# Altium PCB PCB1.PcbDoc
Units mil, origin at the board's own origin, x right, y up, seen from the top; angles counter-clockwise.
Board outline 6195 x 3955 mil, 2 copper layers (Top Layer, Bottom Layer); 31 components, 47 nets, 182 pads, 4 vias.
Unrouted connection lines stored in the file: 2.
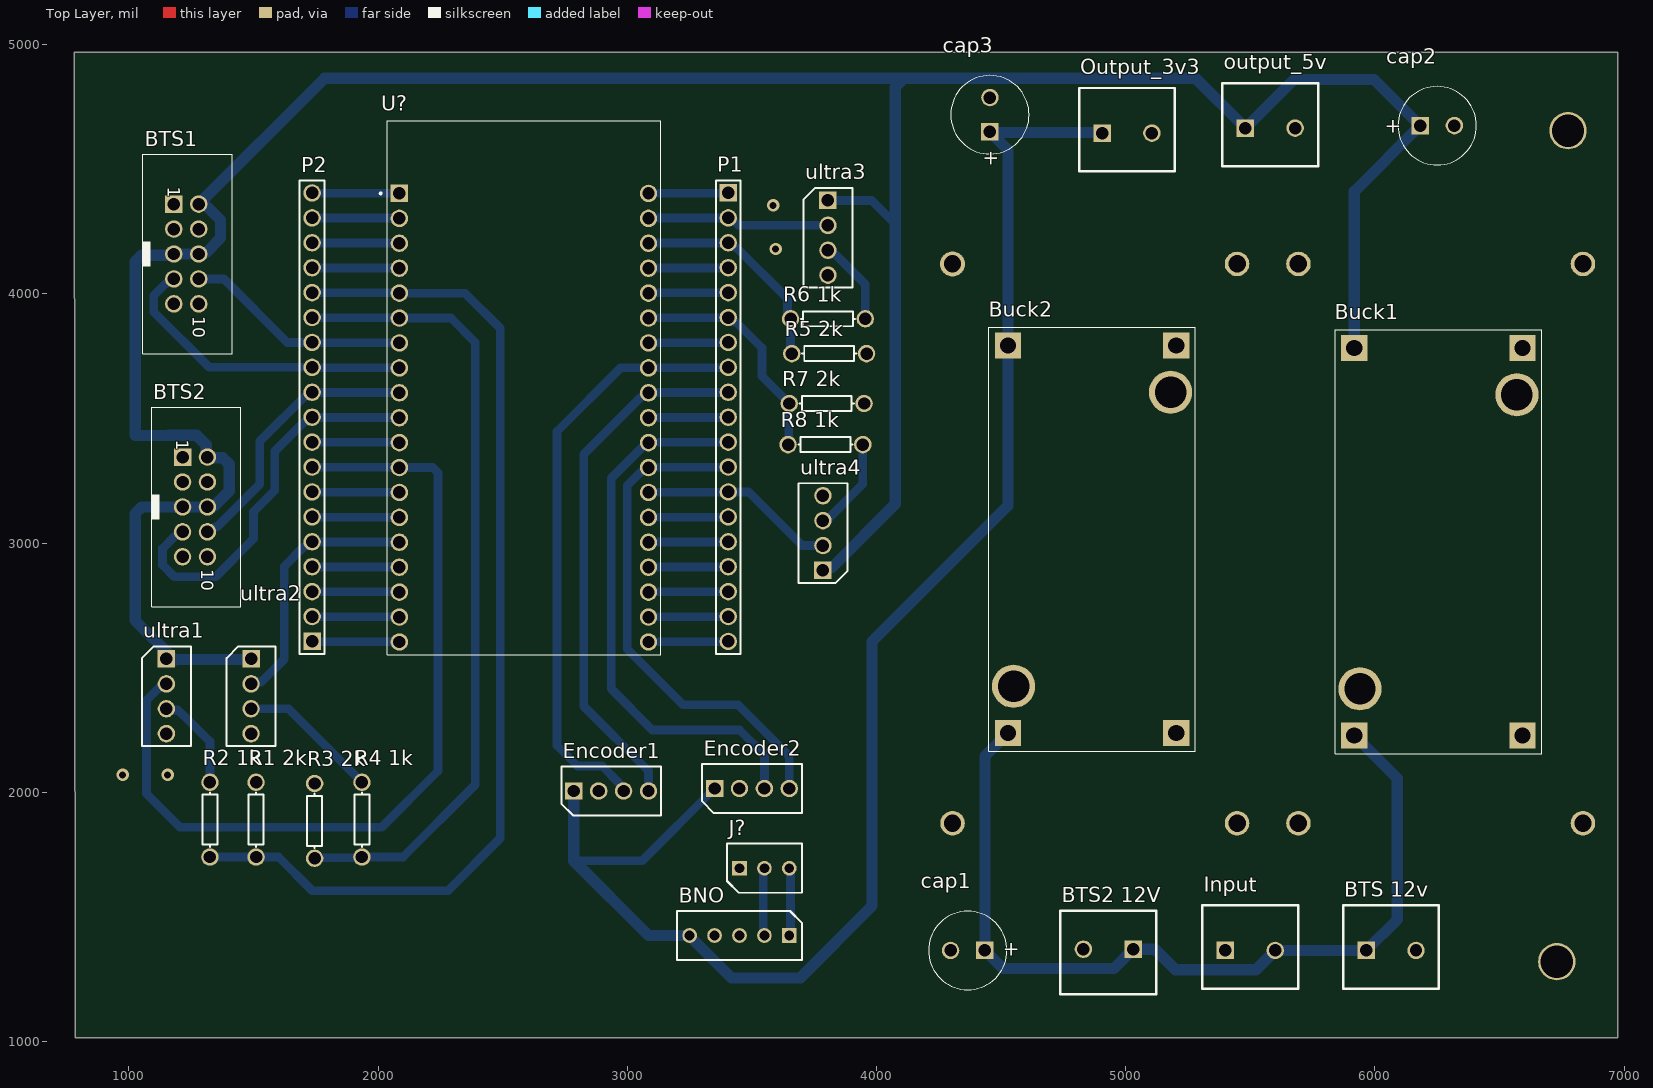
[diagram p0: Top Layer view]
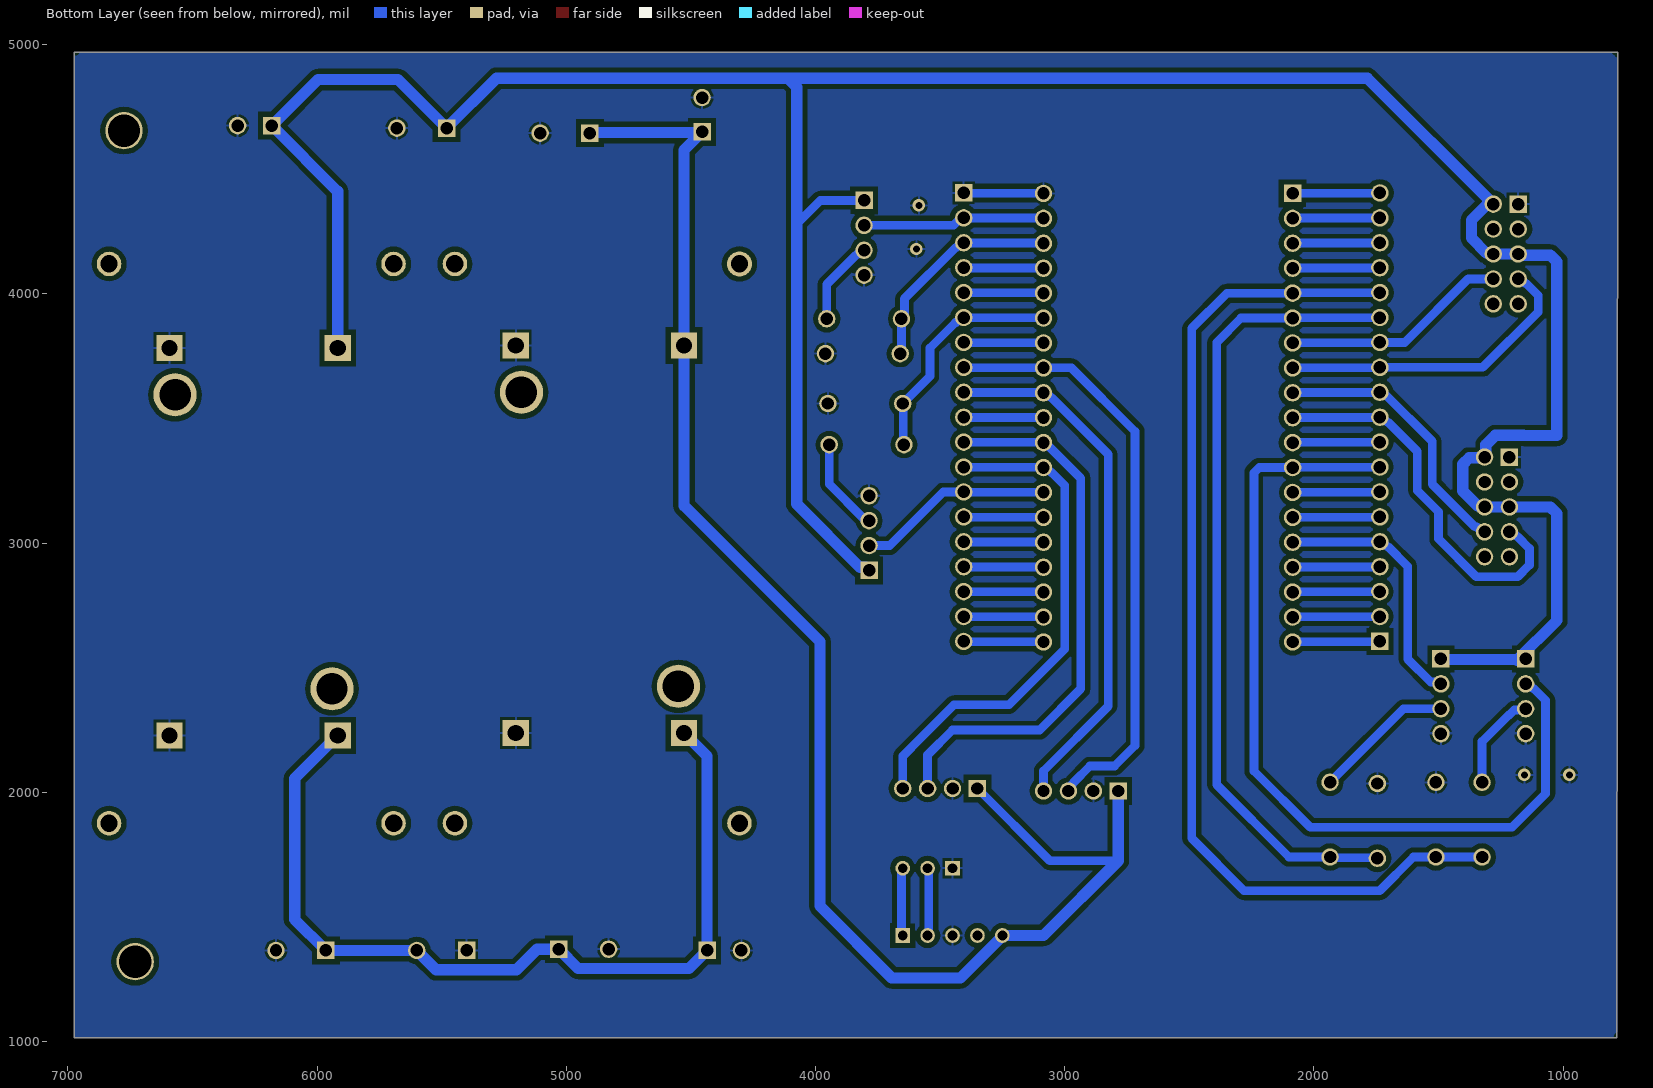
[diagram p1: Bottom Layer view, seen from below]
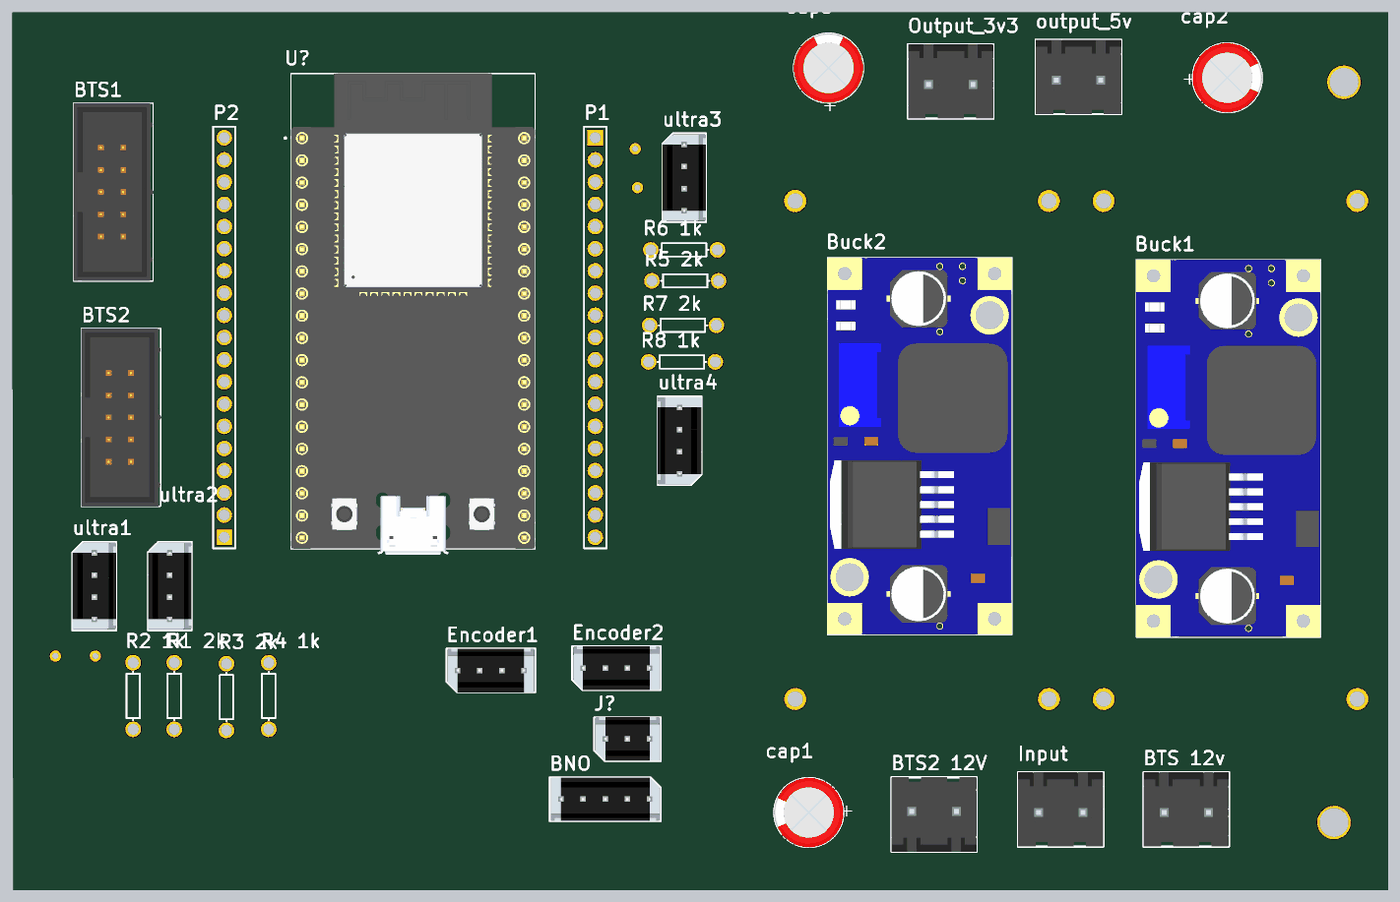
[diagram p2: 3D render of the assembled board from above, using the file's embedded part models]

## Layer stack, top to bottom
Top Solder: solder mask 0.4, Solder Resist, Dk 3.5
Top Layer: signal copper 1.4
Dielectric 1: dielectric 12.6, FR-4, Dk 4.8
Bottom Layer: signal copper 1.4
Bottom Solder: solder mask 0.4, Solder Resist, Dk 3.5

## Board outline
780,4970 6975,4970 6975,1015 785,1015

## Design rules (kind name [scope] priority, off if disabled: settings)
Clearance [All] p1: gap=20 ignorepadtopadclearanceinfootprint=FALSE except(10: SMDPad-SMDPad SMDPad-THPad THPad-THPad)
PolygonConnect [All] p1: connectstyle=Relief reliefconductorwidth=10 reliefentries=4 polygonreliefangle="90 Angle" airgapwidth=10
RoutingVias [All] p1: holewidth=28 width=50 viastyle="Through Hole" minholewidth=28 minwidth=50 maxholewidth=28 maxwidth=50
SolderMaskExpansion [All] p1: expansion=4 istentingtop=FALSE
Width [All] p1: maxlimit=45 minlimit=15 preferedwidth=30 minimp=50.000000 maximp=50.000000 favimp=50.000000
30 further rules are at their usual default settings.

## Components (designator, comment, footprint, x,y, rotation, side; value= is the part's Value field where it differs from the comment)
BNO "66100511622" 66100511622 3450,1425 r0 top
BTS1 "61201021621" 61201021621 1230,4160 r270 top
BTS2 "61201021621" 61201021621 1265,3145 r270 top
"BTS2 12V" "691701500002B" 691701500002B 4930,1370 r180 top
"BTS 12v" "691701500002B" 691701500002B 6065,1365 r0 top
Buck1 "MC00100" CONV_MC00100 6255,3005 r90 top
Buck2 "MC00100" CONV_MC00100 4865,3015 r90 top
cap1 "330 μF" "WCAP-AT1H 8x11.5x3.5x0.5" 4366.1,1365 r180 top
cap2 "330 μF" "WCAP-AT1H 8x11.5x3.5x0.5" 6250,4675 r0 top
cap3 "330 μF" "WCAP-AT1H 8x11.5x3.5x0.5" 4455,4718.9 r90 top
Encoder1 "66100411622" 66100411622 2935,2005 r180 top (schematic designator encoder1)
Encoder2 "66100411622" 66100411622 3500,2015 r180 top (schematic designator encoder2)
Input "691701500002B" 691701500002B 5500,1365 r0 top
J? "66100311622" 66100311622 3550,1695 r180 top
Output_3v3 "691701500002B" 691701500002B 5005,4645 r0 top
output_5v "691701500002B" 691701500002B 5580,4665 r0 top
P1 "Header 19" HDR1X19 3405,4405 r270 top
P2 "Header 19" HDR1X19 1735,2605 r90 top
"R1 2k" "Res1" AXIAL-0.3 1510,1890 r270 top value=1K
"R2 1k" "Res1" AXIAL-0.3 1325,1890 r90 top value=1K
"R3 2k" "Res1" AXIAL-0.3 1745,1885 r270 top value=1K
"R4 1k" "Res1" AXIAL-0.3 1935,1890 r90 top value=1K
"R5 2k" "Res1" AXIAL-0.3 3810,3760 r180 top value=1K
"R6 1k" "Res1" AXIAL-0.3 3805,3900 r0 top value=1K
"R7 2k" "Res1" AXIAL-0.3 3800,3560 r180 top value=1K
"R8 1k" "Res1" AXIAL-0.3 3795,3395 r0 top value=1K
U? "ESP32-DEVKITC-32D" MODULE_ESP32-DEVKITC-32D 2585,3625 r0 top
ultra1 "66100411622" 66100411622 1150,2385 r90 top
ultra2 "66100411622" 66100411622 1490,2385 r90 top
ultra3 "66100411622" 66100411622 3805,4225 r90 top
ultra4 "66100411622" 66100411622 3785,3040 r270 top

## Footprints (in the part's own frame and the unit in brackets; to place one, negate y for a bottom-side part, rotate by r counter-clockwise, add the part's x,y. Pads: shape width x height; smd on the part's side, far side on the other; paste and mask are expansions set on the pad)
61201021621 [mil] "10 pins, straight, gold plating"
  rect 70x70 hole 50: 1(-200,-50)
  round 70 hole 50: 2(-200,50) 3(-100,-50) 4(-100,50) 5(0,-50) 6(0,50) 7(100,-50) 8(100,50) 9(200,-50) 10(200,50)
  silkscreen extent -401,-174 401,184, body extent -401,-174 401,187, height 359
66100311622 [mm] "2.54 mm Intercom Male Horizontal Shrouded Header, 3p"
  rect 1.5x1.5 hole 1: 1(2.54,0)
  round 1.5 hole 1: 2(0,0) 3(-2.54,0)
  silkscreen extent -3.81,-2.5 3.81,2.5, body extent -3.66,-2.54 3.66,2.46, height 11.25
66100411622 [mil] "2.54 mm Intercom Male Horizontal Shrouded Header, 4p"
  rect 70x70 hole 50: 1(150,0)
  round 70 hole 50: 2(50,0) 3(-50,0) 4(-150,0)
  silkscreen extent -200,-98 200,98, body extent -194,-98 194,98, height 443
66100511622 [mm] "2.54 mm Intercom Male Horizontal Shrouded Header, 5p"
  rect 1.5x1.5 hole 1: 1(5.08,0)
  round 1.5 hole 1: 2(2.54,0) 3(0,0) 4(-2.54,0) 5(-5.08,0)
  silkscreen extent -6.35,-2.5 6.35,2.5, body extent -6.2,-2.5 6.2,2.5, height 11.25
691701500002B [mil] "THR - 5,08mm - PCB Vertical Open - 02p"
  rect 70x70 hole 50: 1(-100,0)
  round 70 hole 50: 2(100,0)
  silkscreen extent -192,-154 192,181, body extent -192,-154 192,181, height 474
AXIAL-0.3 [mil] "Axial Device, Thru-Hole; 2 Leads; 0.3 in Pin Spacing"
  round 70 hole 50: 1(-150,0) 2(150,0)
  silkscreen extent -109,-30 109,30
CONV_MC00100 [mil]
  rect 105.63x105.63 hole 65 mask+4.02: IN+(-777.5,337.5) IN-(-777.5,-337.5) OUT+(777.5,337.5) OUT-(777.5,-337.5)
  round 173.23 hole 125.98 mask+4.02: MH1(-590,315) MH2(590,-315)
  silkscreen extent -850,-415 850,415, body extent -850,-415 850,415, height 551
HDR1X19 [mil] "Connector; Header; 19 Position"
  rect 70x70 hole 50: 1(0,0)
  round 70 hole 50: 2(100,0) 3(200,0) 4(300,0) 5(400,0) 6(500,0) 7(600,0) 8(700,0) 9(800,0) 10(900,0) 11(1000,0) 12(1100,0) 13(1200,0) 14(1300,0) 15(1400,0) 16(1500,0) 17(1600,0) 18(1700,0) 19(1800,0)
  silkscreen extent -50,-50 1850,50
MODULE_ESP32-DEVKITC-32D [mil]
  rect 70x70 hole 50: J2-1(-500,777.95)
  round 70 hole 50: J2-2(-500,677.95) J2-3(-500,577.95) J2-4(-500,477.95) J2-5(-500,377.95) J2-6(-500,277.95) J2-7(-500,177.95) J2-8(-500,77.95) J2-9(-500,-22.05) J2-10(-500,-122.05) J2-11(-500,-222.05) J2-12(-500,-322.05) J2-13(-500,-422.05) J2-14(-500,-522.05) J2-15(-500,-622.05) J2-16(-500,-722.05) J2-17(-500,-822.05) J2-18(-500,-922.05) J2-19(-500,-1022.05) J3-1(500,777.95) J3-2(500,677.95) J3-3(500,577.95) J3-4(500,477.95) J3-5(500,377.95) J3-6(500,277.95) J3-7(500,177.95) J3-8(500,77.95) J3-9(500,-22.05) J3-10(500,-122.05) J3-11(500,-222.05) J3-12(500,-322.05) J3-13(500,-422.05) J3-14(500,-522.05) J3-15(500,-622.05) J3-16(500,-722.05) J3-17(500,-822.05) J3-18(500,-922.05) J3-19(500,-1022.05)
  silkscreen extent -579,-1073 549,1069, body extent -550,-1098 550,1071, height 263
"WCAP-AT1H 8x11.5x3.5x0.5" [mil] "Polarized capacitors, Aluminum Electrolytic Capacitors, 2-Leads, Body 8x11.5x3.5x0.5"
  rect 70x70 hole 50: 1(-68.9,0)
  round 70 hole 50: 2(68.9,0)
  silkscreen extent -157,-157 157,157, body extent -156,-157 157,157, height 768

## Part data
BNO: "WR-WTB 2.54 mm Intercom Male Horizontal Shrouded Header, 5p", ComponentLink1Description=Manufacturer, ComponentLink1URL=http://www.we-online.de, ComponentLink2Description=Datasheet, ComponentLink2URL=http://katalog.we-online.de/em/datasheet/6610XX11622.pdf, Part Number=66100511622, Pin Number=5, Pitch="2.54 mm", Published Date="June 2017", Publisher="Wurth Elektronik"
BTS1 BTS2: "WR-BHD 2.54mm Male Box Header", Manufacturer="Wurth Elektronik", ComponentLink1 Description=Manufacturer, ComponentLink1URL=http://www.we-online.com, ComponentLink2 Description=Datasheet, ComponentLink2URL=http://katalog.we-online.de/em/datasheet/6120xx21621.pdf, Created by="Baojun Chen", Created Date="March 2016", NoPins=10, partNo=61201021621
"BTS2 12V" "BTS 12v" Input Output_3v3 output_5v: "WR-TBL Serie 7015 B - 5.08 mm Open Vertical PCB Header THR Type, 02p", ComponentLink1Description=Manufacturer, ComponentLink1URL=http://www.we-online.de, ComponentLink2Description=Datasheet, ComponentLink2URL=http://katalog.we-online.de/em/datasheet/6917015000xxB.pdf, Part Number=691701500002B, Pin Number=02p, Pitch="5.08 mm", Published Date="Feb. 2017", Publisher="Wurth Elektronik"
Buck1 Buck2: "DC-DC LM2596 Step Down Adjustable Converter Power Supply Module 1.3V-35V", Package=None, Check_prices=https://www.snapeda.com/parts/MC00100/YKS/view-part/?ref=eda, MF=YKS, MP=MC00100, SnapEDA_Link=https://www.snapeda.com/parts/MC00100/YKS/view-part/?ref=snap
cap1 cap2 cap3: library part "WCAP-AT1H 8x11.5x3.5x0.5 860240274006", "WCAP-AT1H Aluminum Electrolytic Capacitors , 330 μF; + / - 20%; 10 V , 8 x 11,5", Manufacturer="Wurth Elektronik", partNo=860240274006, Application="Medium and high voltage type range from 160V-450V used as primary side input filter in power supply; Low voltage type used as energy storage or low frequency filtering in circuit, applied to general switching power supply, AC-DC converter, adapter, charger, TV, VCR, DC motor circuit filter, digital audio, digital cameras, digital video cameras, satellite receiver etc.", Capacitance="330 μF", Characteristics="Aluminum Electrolytic Capacitor; Recommended soldering: Wave; Operating temperature:–40 °C to +105 °C for UR < 400 V; –25 °C to +105 °C for UR ≥ 400 V; Long life product series; Higher permissible ripple current; Load life: 5000–10000 h @ +105 °C", ComponentLink1Description=Manufacturer, ComponentLink1URL=http://www.we-online.com, ComponentLink2Description=Datasheet, ComponentLink2URL=http://katalog.we-online.de/pbs/datasheet/860240274006.pdf, Created by="Karrer Zheng", Created Date=6/8/2015, E-mail=libraries@we-online.com
Encoder1 Encoder2 ultra1 ultra2 ultra3 ultra4: "WR-WTB 2.54 mm Intercom Male Horizontal Shrouded Header, 4p", ComponentLink1Description=Manufacturer, ComponentLink1URL=http://www.we-online.de, ComponentLink2Description=Datasheet, ComponentLink2URL=http://katalog.we-online.de/em/datasheet/6610XX11622.pdf, Part Number=66100411622, Pin Number=4, Pitch="2.54 mm", Published Date="June 2017", Publisher="Wurth Elektronik"
J?: "WR-WTB 2.54 mm Intercom Male Horizontal Shrouded Header, 3p", ComponentLink1Description=Manufacturer, ComponentLink1URL=http://www.we-online.de, ComponentLink2Description=Datasheet, ComponentLink2URL=http://katalog.we-online.de/em/datasheet/6610XX11622.pdf, Part Number=66100311622, Pin Number=3, Pitch="2.54 mm", Published Date="June 2017", Publisher="Wurth Elektronik"
P1 P2: "Header, 19-Pin", LatestRevisionDate=17-Jul-2002, LatestRevisionNote="Re-released for DXP Platform.", Publisher="Altium Limited"
"R1 2k" "R2 1k" "R3 2k" "R4 1k" "R5 2k" "R6 1k" "R7 2k" "R8 1k": "Resistor", LatestRevisionDate=17-Jul-2002, LatestRevisionNote="Re-released for DXP Platform.", PackageDescription="Axial Device, Thru-Hole; 2 Leads; 0.3 in Pin Spacing", PackageReference=AXIAL-0.3, Published=8-Jun-2000, Publisher="Altium Limited"
U?: "WiFi Development Tools (802.11) ESP32 General Development Kit, ESP32-WROOM-32D on the board", Package=None, Check_prices=https://www.snapeda.com/parts/ESP32-DEVKITC-32D/Espressif+Systems/view-part/?ref=eda, MF="Espressif Systems", MP=ESP32-DEVKITC-32D, SnapEDA_Link=https://www.snapeda.com/parts/ESP32-DEVKITC-32D/Espressif+Systems/view-part/?ref=snap

## Free pads (board coordinates)
  round 100 hole 70: 8(4305,4120)
  round 98.43 hole 70: 9(5446.73,4120) 10(4305,1875.91) 11(5446.73,1875.91) 12(5693.27,1875.91) 13(6835,1875.91) 14(6835,4120) 15(5693.27,4120)
  round 150 hole 130 unplated: 18(6775,4655) 19(6730,1320)

## Via types
v1: diameter 50, hole 28, Top Layer to Bottom Layer, 4 vias

## Nets (pads, with @x,y where several pads share a name; then routed paths per layer and width w, separated by ;. In a path a pad name is that pad's centre, name@x,y a point inside that pad or via, vN(x,y) a via of type N, cw(c..) or ccw(c..) an arc to the next point about the centre after c; other vN are vias at no path point)
3v3: BNO.5 Buck2.OUT+ cap3.1 Encoder1.1 Encoder2.1 Output_3v3.1 | length 6288.6
  Bottom Layer w35: 2785,1725 3060,1725 Encoder2.1
  Bottom Layer w45: Encoder1.1 2785,1725 3085,1425 BNO.5 3250,1423.14 3418.14,1255 3693.82,1255 3981.91,1543.09 3981.91,2604.25 4527.5,3149.84 Buck2.OUT+ 4527.5,4577.5 cap3.1@4457.5,4647.5 ; cap3.1 cap3.1@4457.5,4647.5 ; Output_3v3.1 4902.5,4647.5 cap3.1@4457.5,4647.5
+5: BTS1.2 BTS1.5 BTS1.6 BTS2.2 BTS2.5 BTS2.6 Buck1.OUT+ cap2.1 output_5v.1 ultra1.1 ultra2.1 ultra3.1 ultra4.1 | length 11956.8
  Bottom Layer w35: ultra3.1 3980,4375 4075,4280
  Bottom Layer w45: BTS1.6 BTS1.5 1175.22,4155.22 1051.36,4155.22 1025,4128.86 1025,3431.36 1157.11,3431.36 1158.25,3432.5 1271.75,3432.5 1310.22,3394.03 1310.22,3349.78 1317.5,3342.5 1376.14,3342.5 1402.5,3316.14 1402.5,3208.76 1343.53,3149.78 1319.78,3149.78 BTS2.6 BTS2.5 1051.36,3145 1025,3118.64 1025,2690 1185,2530 1187.5,2532.5 1487.5,2532.5 ultra2.1 ; BTS1.6@1308.53,4164.78 1367.5,4223.76 1367.5,4296.24 1308.53,4355.22 1284.78,4355.22 BTS1.2 1785,4865 4110,4865 ; ultra4.1 3797.5,2902.5 3821.24,2902.5 4075,3156.26 4075,4280 4075,4830 4110.3,4865.3 5279.7,4865.3 output_5v.1 5675,4860 5996.1,4860 cap2.1 5917.5,4411.4 Buck1.OUT+
+12: "BTS2 12V.1" "BTS 12v.1" Buck1.IN+ Buck2.IN+ cap1.1 Input.2 | length 3554.9
  Bottom Layer w45: Buck2.IN+ 4435,2145 cap1.1 4507.5,1292.5 4952.5,1292.5 5030,1370 5117.53,1370 5200.03,1287.5 5522.5,1287.5 Input.2 5965,1365 6090,1490 6090,2055 Buck1.IN+
\: "R1 2k.2" "R2 1k.1" P2.15 U?.J2-5 | length 4168.9
  Bottom Layer w35: 1325,1740 1510,1740 1600,1740 1735,1605 2280,1605 2490,1815 2490,3861.59 2348.64,4002.95 U?.J2-5 2083.98,4003.98 1736.02,4003.98 P2.15
echo2: "R3 2k.2" "R4 1k.1" P2.14 U?.J2-6 | length 3238.6
  Bottom Layer w35: P2.14 1736.02,3903.98 2083.98,3903.98 U?.J2-6 2292.05,3902.95 2390,3805 2390,2030 2100,1740 1935,1740 1932.5,1737.5 1747.5,1737.5 1745,1735
echo3: "R5 2k.2" "R6 1k.1" P1.3 U?.J3-3 | length 879.2
  Bottom Layer w35: U?.J3-3 3086.02,4203.98 3403.98,4203.98 P1.3 3415.82,4205 3435.82,4185 3438.14,4185 3643.14,3980 3643.14,3906.86 3655,3895 3655,3765 3660,3760
echo4: "R7 2k.2" "R8 1k.1" P1.6 U?.J3-6 | length 942.1
  Bottom Layer w35: U?.J3-6 3086.02,3903.98 3403.98,3903.98 P1.6 3415.82,3905 3435.82,3885 3438.14,3885 3540.24,3782.9 3540.24,3669.76 3650,3560 3647.5,3557.5 3647.5,3397.5 3645,3395
GND: "BTS2 12V.2" "BTS 12v.2" "R1 2k.1" "R3 2k.1" "R5 2k.1" "R7 2k.1" BNO.3 BTS1.1 BTS2.1 Buck1.IN- Buck1.OUT- Buck2.IN- Buck2.OUT- cap1.2 cap2.2 cap3.2 Encoder1.2 Encoder2.2 Input.1 J?.1 Output_3v3.2 output_5v.2 P1.1 U?.J3-1 ultra1.4 ultra2.4 ultra3.4 ultra4.4 | length 320.8
  Bottom Layer w35: U?.J3-1 3086.02,4403.98 3403.98,4403.98 P1.1
  other v1: 975,2070 1155,2070 3595,4180 3585,4355
M1A: Encoder1.3 P1.8 U?.J3-8 | length 2404.9
  Bottom Layer w35: Encoder1.3 2985,2015.82 2965,2035.82 2965,2038.14 2898.14,2105 2800,2105 2717.57,2187.43 2717.57,3447.57 2972.95,3702.95 U?.J3-8 3086.02,3703.98 3403.98,3703.98 P1.8
M1B: Encoder1.4 P1.9 U?.J3-9 | length 2141.9
  Bottom Layer w35: Encoder1.4 3085,2085 2825,2345 2825,3356.09 3051.86,3582.95 3054.18,3582.95 3074.18,3602.95 U?.J3-9 3086.02,3603.98 3403.98,3603.98 P1.9
M2A: Encoder2.3 P1.11 U?.J3-11 | length 2235.1
  Bottom Layer w35: P1.11 3403.98,3403.98 3086.02,3403.98 U?.J3-11 3077.47,3402.95 2935,3260.48 2935,2415 3100,2250 3450,2250 3550,2150 Encoder2.3
M2B: Encoder2.4 P1.12 U?.J3-12 | length 2049.9
  Bottom Layer w35: P1.12 3403.98,3303.98 3086.02,3303.98 U?.J3-12 3074.18,3302.95 3054.18,3282.95 3051.86,3282.95 3000,3231.09 3000,2574.82 3223.56,2351.25 3443.75,2351.25 3575,2220 3650,2145 Encoder2.4
NetBNO_1: BNO.1 J?.3 | length 274.1
  Bottom Layer w35: BNO.1 3655,1430 3655,1690 J?.3
NetBNO_2: BNO.2 J?.2 | length 274.1
  Bottom Layer w35: BNO.2 3545,1430 3545,1690 J?.2
NetP1_4: P1.4 U?.J3-4 | length 320.8
  Bottom Layer w35: U?.J3-4 3086.02,4103.98 3403.98,4103.98 P1.4
NetP1_5: P1.5 U?.J3-5 | length 320.8
  Bottom Layer w35: U?.J3-5 3086.02,4003.98 3403.98,4003.98 P1.5
NetP1_7: P1.7 U?.J3-7 | length 320.8
  Bottom Layer w35: U?.J3-7 3086.02,3803.98 3403.98,3803.98 P1.7
NetP1_10: P1.10 U?.J3-10 | length 320.8
  Bottom Layer w35: U?.J3-10 3086.02,3503.98 3403.98,3503.98 P1.10
NetP1_14: P1.14 U?.J3-14 | length 320.8
  Bottom Layer w35: U?.J3-14 3086.02,3103.98 3403.98,3103.98 P1.14
NetP1_15: P1.15 U?.J3-15 | length 320.8
  Bottom Layer w35: U?.J3-15 3086.02,3003.98 3403.98,3003.98 P1.15
NetP1_16: P1.16 U?.J3-16 | length 320.8
  Bottom Layer w35: U?.J3-16 3086.02,2903.98 3403.98,2903.98 P1.16
NetP1_17: P1.17 U?.J3-17 | length 320.8
  Bottom Layer w35: U?.J3-17 3086.02,2803.98 3403.98,2803.98 P1.17
NetP1_18: P1.18 U?.J3-18 | length 320.8
  Bottom Layer w35: U?.J3-18 3086.02,2703.98 3403.98,2703.98 P1.18
NetP1_19: P1.19 U?.J3-19 | length 320.8
  Bottom Layer w35: U?.J3-19 3086.02,2603.98 3403.98,2603.98 P1.19
NetP2_1: P2.1 U?.J2-19 | length 350.8
  Bottom Layer w35: P2.1 1736.02,2603.98 2083.98,2603.98 U?.J2-19
NetP2_2: P2.2 U?.J2-18 | length 350.8
  Bottom Layer w35: P2.2 1736.02,2703.98 2083.98,2703.98 U?.J2-18
NetP2_3: P2.3 U?.J2-17 | length 350.8
  Bottom Layer w35: P2.3 1736.02,2803.98 2083.98,2803.98 U?.J2-17
NetP2_4: P2.4 U?.J2-16 | length 350.8
  Bottom Layer w35: P2.4 1736.02,2903.98 2083.98,2903.98 U?.J2-16
NetP2_6: P2.6 U?.J2-14 | length 350.8
  Bottom Layer w35: P2.6 1736.02,3103.98 2083.98,3103.98 U?.J2-14
NetP2_7: P2.7 U?.J2-13 | length 350.8
  Bottom Layer w35: P2.7 1736.02,3203.98 2083.98,3203.98 U?.J2-13
NetP2_9: P2.9 U?.J2-11 | length 350.8
  Bottom Layer w35: P2.9 1736.02,3403.98 2083.98,3403.98 U?.J2-11
NetP2_16: P2.16 U?.J2-4 | length 350.8
  Bottom Layer w35: P2.16 1736.02,4103.98 2083.98,4103.98 U?.J2-4
NetP2_17: P2.17 U?.J2-3 | length 350.8
  Bottom Layer w35: P2.17 1736.02,4203.98 2083.98,4203.98 U?.J2-3
NetP2_18: P2.18 U?.J2-2 | length 350.8
  Bottom Layer w35: P2.18 1736.02,4303.98 2083.98,4303.98 U?.J2-2
NetP2_19: P2.19 U?.J2-1 | length 350.8
  Bottom Layer w35: P2.19 1736.02,4403.98 2083.98,4403.98 U?.J2-1
"NetR2 1k_2": "R2 1k.2" ultra1.3 | length 355.7
  Bottom Layer w35: 1185,2330 1195.82,2330 1215.82,2310 1218.14,2310 1325,2203.14 1325,2040
"NetR4 1k_2": "R4 1k.2" ultra2.3 | length 567.2
  Bottom Layer w35: ultra2.3 1640,2335 1935,2040
"NetR6 1k_2": "R6 1k.2" ultra3.3 | length 344.8
  Bottom Layer w35: ultra3.3 3815.82,4175 3835.82,4155 3838.14,4155 3955,4038.14 3955,3900
"NetR8 1k_2": "R8 1k.2" ultra4.3 | length 379
  Bottom Layer w35: ultra4.3 3792.65,3097.65 3805.79,3097.65 3945,3236.86 3945,3395
RB1_33: BTS1.8 P2.13 U?.J2-7 | length 911.5
  Bottom Layer w35: BTS1.8 1380,4060 1635,3805 P2.13 1736.02,3803.98 2083.98,3803.98 U?.J2-7
RB2_26: BTS2.8 P2.11 U?.J2-9 | length 1103.8
  Bottom Layer w35: BTS2.8 1325.82,3045 1345.82,3065 1354.2,3065 1525,3235.8 1525,3408.14 1714.21,3597.35 1727.35,3597.35 P2.11 1736.02,3603.98 2083.98,3603.98 U?.J2-9
RF1_32: BTS1.7 P2.12 U?.J2-8 | length 1251.7
  Bottom Layer w35: BTS1.7 1169.18,4060 1149.18,4040 1146.86,4040 1100,3993.14 1100,3926.86 1321.86,3705 P2.12 1736.02,3703.98 2083.98,3703.98 U?.J2-8
RF2_25: BTS2.7 P2.10 U?.J2-10 | length 1565.3
  Bottom Layer w35: BTS2.7 1204.18,3045 1184.18,3025 1181.86,3025 1135,2978.14 1135,2911.86 1181.86,2865 1348.14,2865 1500,3016.86 1500,3125.94 1585,3210.94 1585,3368.14 1701.86,3485 1704.18,3485 1724.18,3505 P2.10 1736.02,3503.98 2083.98,3503.98 U?.J2-10
trig1: P2.8 U?.J2-12 ultra1.2 | length 3511.7
  Bottom Layer w35: ultra1.2 1139.18,2435 1119.18,2415 1116.86,2415 1070,2368.14 1070,1995 1205,1860 2015,1860 2240,2085 2240,3282.43 2219.47,3302.95 U?.J2-12 2083.98,3303.98 1736.02,3303.98 P2.8
trig2: P2.5 U?.J2-15 ultra2.2 | length 1049.7
  Bottom Layer w35: ultra2.2 1497.65,2442.65 1531.29,2442.65 1622.75,2534.11 1622.75,2905.89 1701.86,2985 1704.18,2985 1724.18,3005 P2.5 1736.02,3003.98 2083.98,3003.98 U?.J2-15
trig3: P1.2 U?.J3-2 ultra3.2 | length 733.3
  Bottom Layer w35: U?.J3-2 3086.02,4303.98 3403.98,4303.98 P1.2 3415.82,4305 3445.82,4275 ultra3.2
trig4: P1.13 U?.J3-13 ultra4.2 | length 789.9
  Bottom Layer w35: U?.J3-13 3086.02,3203.98 3403.98,3203.98 P1.13 3487.5,3205 3702.5,2990 ultra4.2
pads on no net: BNO.4 BTS1.3 BTS1.4 BTS1.9 BTS1.10 BTS2.3 BTS2.4 BTS2.9 BTS2.10 Buck1.MH1 Buck1.MH2 Buck2.MH1 Buck2.MH2

## Polygon pours and split planes (outlines as drawn)
GND on Bottom Layer "GND_L02_P000" (solid, pour order 0): 783.4,4970 1005,4970 6975,4970 6975,1015 6960,1015 783.4,1015

## Silkscreen, mask and mechanical layers (free items; w line width, h text height)
Mechanical 1:
  the board outline again, w47.24

## Dimensions
783.4,4970 to 783.4,1015 on Bottom Layer
6975,4970 to 783.4,4970 on Bottom Layer

## Text inside footprints (layer, text, board x,y; h text height)
BTS1: Top Overlay "1" at 1155,4430 h50 r270; Top Overlay "10" at 1255,3910 h50 r270
BTS2: Top Overlay "1" at 1190,3415 h50 r270; Top Overlay "10" at 1290,2895 h50 r270
Buck1: Mechanical 13 "OUT+" at 6038.46,3654.61 h50 r90; Mechanical 13 "OUT-" at 6520.75,3674.29 h50 r90; Mechanical 13 "IN-" at 6520.75,2178.23 h50 r90; Mechanical 13 "IN+" at 6038.46,2178.23 h50 r90
Buck2: Mechanical 13 "OUT+" at 4648.46,3664.61 h50 r90; Mechanical 13 "OUT-" at 5130.75,3684.29 h50 r90; Mechanical 13 "IN-" at 5130.75,2188.23 h50 r90; Mechanical 13 "IN+" at 4648.46,2188.23 h50 r90
cap1: Top Overlay "+" at 4575.75,1394.02 h59.06 r180
cap2: Top Overlay "+" at 6040.35,4645.98 h59.06
cap3: Top Overlay "+" at 4484.02,4509.25 h59.06 r90